# Altium PCB FPGA_Core_FX3.PcbDoc (part 2 of 2)
Units mm, origin at the board's own origin, x right, y up, seen from the top; angles counter-clockwise.
Board outline 27 x 27 mm, 6 copper layers (Signal_T, GND_T, PWR, Signal_INT, GND_B, Signal_B), stack 0.816 mm thick; 82 components, 137 nets, 677 pads, 343 vias.
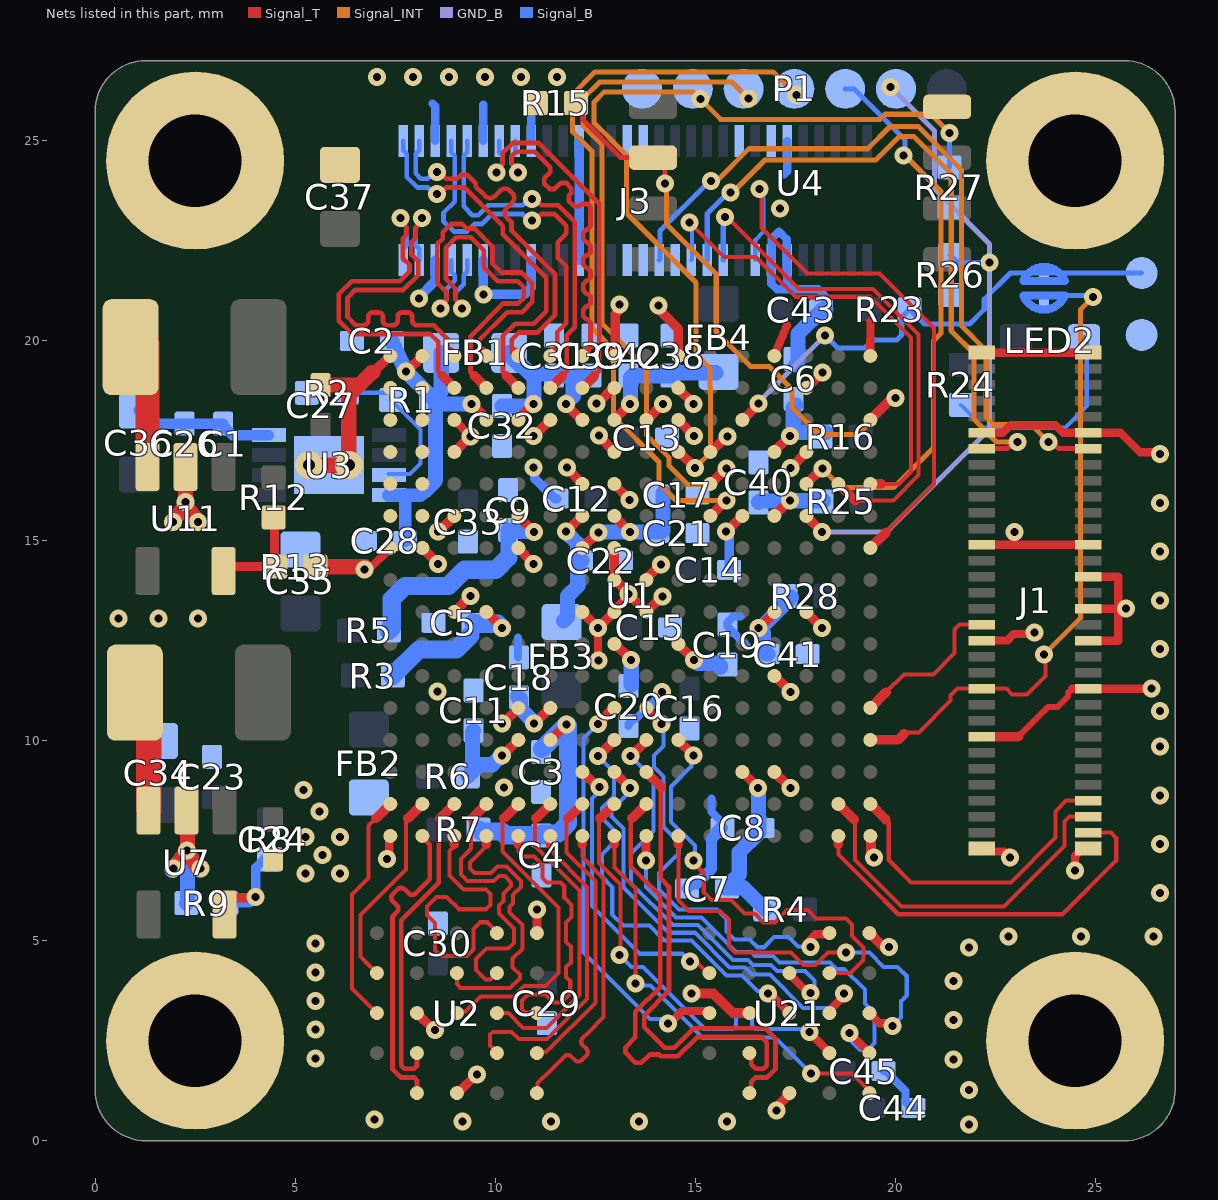
[diagram p6: the nets of this part, all layers, seen from the top]

## Via types
v1: diameter 0.45, hole 0.2, Signal_T to Signal_B, tented both sides, 340 vias
v2: diameter 0.7, hole 0.3, Signal_T to Signal_B, tented both sides, 2 vias
v3: diameter 0.45, hole 0.2, Signal_T to Signal_B, tented top, 1 vias

## Nets (pads, with @x,y where several pads share a name; then routed paths per layer and width w, separated by ;. In a path a pad name is that pad's centre, name@x,y a point inside that pad or via, vN(x,y) a via of type N, cw(c..) or ccw(c..) an arc to the next point about the centre after c; other vN are vias at no path point) (continued)
GND: C1.1 C2.1 C3.1 C4.1 C5.1 C6.1 C7.1 C8.1 C9.1 C11.1 C12.1 C13.1 C14.1 C15.1 C16.1 C17.1 C18.1 C19.1 C20.1 C21.1 C22.1 C23.1 C24.1 C26.1 C27.1 C28.1 C29.1 C30.1 C31.1 C32.1 C33.1 C34.2 C35.2 C36.2 C37.2 C38.1 C39.1 C40.1 C41.1 C42.1 C43.1 C44.1 C45.1 J1.9 J1.10 J1.23 J1.24 J1.27 J1.31 J1.35 J1.36 J1.41 J1.48 J1.S1 J3.11 J3.12 J3.13 J3.14 J3.37 J3.38 J3.43 J3.44 J3.49 J3.50 J3.55 J3.56 L7.1 P1.1 pad.Q5 pad.Q6 pad.Q7 pad.Q8 R2.1 R9.2 R13.1 R15.2 R26.1 R27.1 U1.A1 U1.A8 U1.A10 U1.A13 U1.A16 U1.B8 U1.B10 U1.B14 U1.C3 U1.C6 U1.C9 U1.C10 U1.D3 U1.D8 U1.D14 U1.E7 U1.E8 U1.F3 U1.F12 U1.G1 U1.G2 U1.G5 U1.G8 U1.H8 U1.H9 U1.J3 U1.J7 U1.J8 U1.J9 U1.J14 U1.L13 U1.M5 U1.P13 U1.T1 U1.T16 U2.B3 U2.C1 U2.E5 U3.4 U3.9 U4.4 U7.2 U11.2 U21.B3 U21.C1 U21.E5 | length 93.6
  Signal_T w0.102: v1(7.296,7.04) v1@7.351,7.095 ; U1.T1@7.351,7.592 U1.T1@7.379,7.62
  Signal_T w0.152: 23.089,10.109 23.825,10.846 24.061,10.846 24.324,11.108 24.324,11.201 24.421,11.299
  Signal_T w0.203: v1(6.738,14.285) 6.844,14.285 U1.G1@7.379,14.82 ; v1@7.351,7.095 U1.T1@7.351,7.592 ; U1.C3@8.979,18.02 8.979,18.016 9.374,17.621 v1@9.374,17.607 ; U2.C1@9.045,1.191 U2.C1@9.068,1.191 ; v1@9.527,1.651 v1(9.55,1.651) ; v1@12.575,12.016 v1@12.575,12.807 ; U1.A13@16.979,19.62 17.297,20.396 ; U1.A16@19.379,19.62 19.38,20.498 ; J1.S1@22.17,7.3 22.243,7.227 22.73,7.227 v1(22.872,7.084) ; J1.36@22.17,12.5 22.179,12.509 22.805,12.509 22.959,12.663 23.437,12.663 v1(23.485,12.71) ; J1.24@22.17,14.9 22.962,14.9 ; J1.10@22.17,17.7 22.701,17.7 22.887,17.886 24.009,17.886 24.195,17.7 J1.9@24.83,17.7 25.632,17.7 26.121,17.211 26.572,17.211 v1(26.619,17.164) ; J1.S1@22.17,19.7 J1.S1@24.83,19.7 ; v1(22.987,15.215) 22.962,15.215 22.962,14.9 ; 24.421,11.299 24.829,11.299 J1.41@24.83,11.3 v1(26.413,11.3) ; v1(24.494,6.76) 24.494,7.119 24.675,7.3 J1.S1@24.83,7.3 ; J1.35@24.83,12.5 25.578,12.5 v1@25.578,13.3 ; J1.31@24.83,13.3 v1@25.578,13.3 ; J1.27@24.83,14.1 25.578,14.1 v1@25.578,13.3 ; J1.23@24.83,14.9 22.962,14.9 ; v1(25.775,13.3) v1@25.578,13.3
  Signal_T w0.229: U2.B3@8.045,3.191 v1@8.439,2.797 ; U2.C1@9.068,1.191 v1@9.527,1.651 ; U2.E5@11.045,5.191 v1(11.045,5.782)
  Signal_T w0.24: 6.947,19.202 7.37,19.625 U1.A1@7.391,19.625 ; U1.G2@8.179,14.82 v1@8.574,14.426 ; v1@8.585,15.226 U1.F3@8.979,15.62 ; U1.J3@8.979,13.22 v1@9.374,13.615 ; U1.D3@8.98,17.213 v1@9.374,17.607 ; v1@10.185,10.426 U1.M5@10.579,10.82 ; U1.G5@10.57,14.818 v1@10.964,14.424 ; v1@10.975,17.619 U1.C6@11.369,18.013 ; v1@11.793,16.815 U1.E7@12.187,16.421 ; U1.J7@12.172,13.22 v1@12.566,12.826 ; v1(12.539,18.434) 12.566,18.434 12.96,18.828 U1.B8@12.979,18.828 ; v1@12.575,12.016 v1(12.584,12.007) ; v1@12.575,12.807 v1(12.566,12.816) 12.571,12.816 12.975,13.22 U1.J8@12.979,13.22 12.979,13.25 13.297,13.568 13.297,13.642 13.337,13.683 U1.H8@12.979,14.041 ; v1@12.593,17.615 U1.D8@12.987,17.221 ; U1.E8@12.966,16.424 v1@13.36,16.03 ; U1.H8@12.979,14.02 U1.H8@12.979,14.041 ; U1.G8@12.979,14.82 U1.H8@12.979,14.041 ; U1.A8@12.979,19.62 13,19.641 13,20.659 13.066,20.724 13.066,20.864 v1(13.106,20.904) ; v1(13.337,13.673) 13.337,13.668 13.779,13.226 U1.J9@13.779,13.22 ; U1.H9@13.742,14.013 v1@14.136,14.407 ; U1.J9@13.778,13.214 v1@14.172,13.608 ; U1.C9@13.792,18.018 14.186,18.412 v1(14.201,18.412) ; v1(14.079,20.879) 14.079,20.794 14.58,20.292 U1.A10@14.58,19.652 ; U1.B10@14.563,18.823 v1@14.957,18.429 ; U1.C10@14.581,18.017 14.581,18.012 14.972,17.621 v1(14.972,17.613) ; v1@15.785,15.235 U1.F12@16.179,15.629 ; U1.P13@16.973,9.219 v1@17.368,8.825 ; U1.L13@16.985,11.624 16.987,11.624 17.371,11.24 v1@17.383,11.24 ; v1@17.032,0.841 U21.C1@17.373,1.182 ; v1@17.395,16.822 U1.D14@17.789,17.216 ; U1.J14@17.772,13.223 v1@18.166,12.829 ; U1.B14@17.78,18.813 v1@18.174,19.207 ; U21.E5@19.357,5.191 19.709,4.84 v1(19.847,4.84) ; J1.48@22.17,10.1 23.079,10.1 23.089,10.109
  Signal_T w0.254: v1(14.905,3.682) 15.454,3.682 15.945,3.191 U21.B3@16.357,3.191 ; U1.T16@19.379,7.62 19.398,7.602 19.398,7.209 19.469,7.138 v1(19.469,7.085)
  Signal_T w0.381: v1@1.917,15.447 v1@2.262,15.891 ; v1@1.949,6.788 2.303,7.247 v1@2.307,7.253 ; U11.2@2.261,16.997 U11.2@2.261,16.845 2.261,16.088 2.262,16.086 v1@2.262,15.891 ; 2.262,15.697 v1@2.262,15.891 ; U7.2@2.286,8.255 2.307,8.234 v1@2.307,7.253 ; v1@2.574,6.791 v1@2.307,7.253 ; v1@2.593,15.46 v1@2.262,15.891 ; v2(5.341,16.887) v2(6.341,16.887) 6.341,18.628 6.602,18.89 ; R13.1@5.504,14.351 6.738,14.351 v1(6.738,14.285) ; C27.1@5.639,18.89 6.602,18.89 ; 6.947,19.202 6.915,19.202 6.602,18.89
  Signal_B w0.203: 8.433,25.933 8.503,25.863 J3.55@8.503,24.994 ; J3.49@9.703,24.994 9.703,25.908 ; C18.1@10.568,12.084 10.568,12.574 ; J3.43@10.903,24.994 10.903,25.813 10.922,25.832 ; C20.1@13.334,10.363 13.334,10.413 13.483,10.562 13.533,10.562 13.847,10.876 13.883,10.876 ; 15.405,8.556 15.405,8.225 C8.1@15.604,8.026 ; 16.134,13.103 15.954,13.103 15.805,12.955 C19.1@15.805,12.905 15.805,12.855 16.3,12.36 ; 17.221,24.155 17.303,24.237 J3.11@17.303,24.994 ; 17.297,21.311 17.303,21.316 J3.12@17.303,22.014 17.29,22.028 17.29,22.537 17.094,22.733 16.917,22.555 16.917,22.028 J3.14@16.903,22.014 16.903,21.425 17.043,21.285 18.085,21.285 18.237,21.133 18.237,20.817 C43.1@18.275,20.78 ; C45.1@19.713,1.742 19.763,1.742 20.258,1.247 20.258,0.972 20.407,0.824 C44.1@20.457,0.824
  Signal_B w0.24: v1(8.103,21.057) 8.103,21.093 8.498,21.488 8.498,22.009 J3.56@8.503,22.014 ; J3.50@9.703,22.014 v1(9.703,21.158) 10.737,21.158 10.903,21.324 J3.44@10.903,22.014 ; v1(10.953,16.825) 10.993,16.784 10.993,16.549 11.49,16.053 C12.1@11.54,16.053 ; J3.38@12.103,22.014 J3.37@12.103,24.994 ; v1(15.776,15.235) 15.776,15.178 15.853,15.101 C14.1@15.853,14.324
  Signal_B w0.254: C36.2@1.092,18.25 1.142,18.25 1.468,17.924 C26.1@2.235,17.924 C1.1@3.202,17.924 3.202,17.874 3.439,17.637 U3.4@4.341,17.637 ; 13.883,10.876 14.176,11.169 v1(14.176,11.222)
  Signal_B w0.279: C7.1@14.797,6.304 14.907,6.414 15.033,6.414 15.41,6.792 15.41,7.549 15.52,7.659 15.52,7.713 15.63,7.823 C8.1@15.68,7.823
  Signal_B w0.381: v1@1.931,6.764 1.949,6.788 2.303,7.247 v1@2.307,7.253 ; R9.2@2.281,5.939 2.286,5.939 2.307,5.961 2.307,6.931 ; 2.349,6.931 v1@2.307,7.253 ; v1@2.547,6.821 v1@2.307,7.253 ; C6.1@17.515,19.393 17.575,19.452 17.575,20.174 18.18,20.78 C43.1@18.275,20.78
  other v1: 21.844,0.406 9.188,0.483 11.392,0.483 13.595,0.483 15.799,0.483 6.985,0.533 17.032,0.75 21.844,1.27 21.463,2.032 5.512,2.06 5.512,2.777 8.497,2.768 21.463,3.023 5.512,3.494 21.463,3.988 5.512,4.211 21.844,4.826 5.512,4.928 22.835,5.105 24.65,5.105 26.465,5.105 26.619,6.198 1.956,6.808 2.634,6.808 2.295,7.253 26.619,7.416 26.619,8.635 17.379,8.82 10.218,8.829 26.619,9.853 10.176,10.426 26.619,10.741 8.56,11.233 17.383,11.22 26.619,12.29 18.166,12.82 0.59,13.057 1.58,13.057 2.569,13.057 26.619,13.509 9.383,13.615 14.182,13.608 14.146,14.407 8.574,14.417 10.964,14.415 26.619,14.727 8.576,15.226 1.944,15.471 2.571,15.471 26.619,15.946 2.257,15.967 13.36,16.02 11.793,16.825 17.385,16.822 9.384,17.607 10.965,17.619 12.593,17.625 14.957,18.419 18.184,19.207 17.124,23.307 7.042,26.594 7.943,26.594 8.843,26.594 9.744,26.594 10.645,26.594 11.545,26.594
GPIO21: J1.2@23.722,20.951 J1.42 U1.N16 | length 16.5
  Signal_T w0.102: 20.222,10.172 20.258,10.207 20.592,10.207 21.387,11.002 21.387,11.125 21.562,11.3 J1.42@22.17,11.3 22.787,11.3 22.927,11.16 23.301,11.16 23.564,11.423 23.76,11.619 23.76,12.109 v1(23.718,12.151)
  Signal_T w0.24: U1.N16@19.379,10.02 20.071,10.02 20.222,10.172
  Signal_INT w0.127: v1(23.718,12.151) 24.638,13.071 24.638,20.785 v1(24.946,21.093)
  Signal_B w0.127: 23.724,21.128 24.242,21.128 24.911,21.128 v1(24.946,21.093)
GPIO24: J1.34 U1.M16 | length 4
  Signal_T w0.102: 19.774,11.215 20.218,11.659 20.959,11.659 21.488,12.188 21.488,12.777 21.612,12.9 J1.34@22.17,12.9
  Signal_T w0.24: U1.M16@19.379,10.82 19.774,11.215
INITN: U1.D11 | length 0.6
  Signal_T w0.24: U1.D11@15.367,17.214 15.391,17.214 15.785,17.608 v3(15.803,17.608)
JTAG_EN: P1.2 R27.2 U1.D10 | length 21.5
  Signal_T w0.24: U1.D10@14.597,17.221 v1@14.991,16.827
  Signal_INT w0.127: v1(14.991,16.817) 15.388,17.213 15.388,18.852 15.367,18.872 15.367,19.318 15.02,19.665 15.02,21.457 13.284,23.193 13.284,24.638 12.475,25.447 12.475,25.97 12.718,26.213 14.963,26.213 15.641,25.534 19.616,25.534 19.744,25.662 20.897,25.662 v1(21.361,25.197)
  Signal_B w0.127: R27.2@21.355,24.335 21.361,24.341 v1(21.361,25.197)
  other v1: 15.138,26.037
JTAG_TCK: P1.6 R26.2 U1.F14 | length 16.5
  Signal_T w0.24: U1.F14@17.772,15.62 v1@18.166,15.226
  GND_B w0.127: v1(18.166,15.216) 19.788,15.216 22.361,17.789 v1(22.361,21.96) 22.361,22.419 20.981,23.799 20.981,25.247 v1(19.888,26.34)
  Signal_B w0.127: R26.2@21.375,22.147 21.562,21.96 v1(22.361,21.96)
JTAG_TDI: P1.4 U1.F11 | length 19.1
  Signal_T w0.24: U1.F11@15.38,15.613 v1@15.774,16.007
  Signal_INT w0.127: v1(15.784,16.007) 14.524,16.007 14.097,16.434 14.097,16.967 12.955,18.11 12.955,19.782 12.421,20.316 12.421,24.74 11.938,25.222 11.938,26.162 12.497,26.721 16.946,26.721 v1(17.528,26.139)
JTAG_TDO: P1.5 U1.E14 | length 14.1
  Signal_T w0.24: U1.E14@17.775,16.411 v1@18.169,16.805
  Signal_INT w0.127: v1(18.179,16.805) 18.652,16.332 19.964,16.332 20.963,17.332 20.963,19.998 21.149,20.184 21.149,23.728 20.249,24.629 v1(20.214,24.629)
  Signal_B w0.127: P1.5@18.752,26.295 18.977,26.295 20.249,25.023 v1@20.249,24.643
JTAG_TMS: P1.3 U1.E11 | length 16.9
  Signal_T w0.24: U1.E11@15.38,16.413 v1@15.774,16.807
  Signal_INT w0.127: v1(15.784,16.807) 15.378,16.401 14.819,16.401 14.351,16.87 14.351,17.072 13.786,17.638 13.786,19.311 12.675,20.422 12.675,24.888 12.192,25.371 12.192,26.046 12.613,26.467 15.922,26.467 v1(16.337,26.052)
LDO_1V0: C2.2 C28.2 FB1.2 R1.2 U1.A2 U1.C4 U3.8 | length 10.1
  Signal_T w0.24: v1@7.785,19.226 U1.A2@8.179,19.62 ; v1@9.424,18.417 U1.C4@9.818,18.023
  Signal_B w0.305: U3.8@7.341,16.137 7.75,16.137 C28.2@7.75,14.999
  Signal_B w0.33: U3.8@7.341,16.137 8.137,16.138 8.23,16.231
  Signal_B w0.381: C2.2@7.416,19.993 v1(7.776,19.226) 8.509,18.493 8.509,18.423 8.61,18.524 8.61,18.706 8.652,18.748 FB1.2@8.652,19.698 ; 8.23,16.231 8.509,16.51 8.509,18.419 9.408,18.419 v1(9.412,18.423)
MCLK: R15.1 U1.C16 U4.6 | length 14.7
  Signal_T w0.127: R15.1@12.019,25.94 12.189,25.77 12.189,25.53 13.143,24.576 U4.6@13.948,24.576 14.009,24.576 14.246,24.339 v1(14.246,23.927)
  Signal_T w0.24: U1.C16@19.38,18.023 19.38,18.025 19.919,18.564 v1(20.014,18.564)
  Signal_INT w0.127: v1(14.246,23.927) 14.289,23.884 14.289,22.907 15.528,21.668 15.528,20.216 16.387,19.356 16.855,19.356 17.424,18.786 17.424,18.339 18.11,17.653 19.075,17.653 19.987,18.564 v1(20.014,18.564)
MIPI0_CLK_N: U1.D2
MIPI0_CLK_P: U1.D1
MIPI0_D0_N: U1.E2
MIPI0_D0_P: U1.E1
MIPI0_D1_N: U1.C2
MIPI0_D1_P: U1.C1
MIPI0_D2_N: U1.F2
MIPI0_D2_P: U1.F1
MIPI0_D3_N: U1.B2
MIPI0_D3_P: U1.B1
MIPI1_CLK_N: J3.59 U1.B5 | length 9.8
  Signal_T w0.117: v1(8.546,23.67) 8.62,23.67 8.781,23.832 9.23,23.832 10.191,22.871 10.191,22.663 11.279,21.575 11.279,20.737 10.964,20.422 10.499,20.422 10.197,20.119 10.197,19.203 U1.B5@10.579,18.82
  Signal_T w0.24: 10.279,19.123 U1.B5@10.579,18.82
  Signal_B w0.117: J3.59@7.703,24.994 7.703,24.76 7.794,24.67 7.794,24.092 8.054,23.832 8.311,23.832 8.472,23.67 v1(8.546,23.67)
MIPI1_CLK_P: J3.57 U1.A5 | length 9.5
  Signal_T w0.117: v1(8.546,24.212) 8.62,24.212 8.781,24.051 9.051,24.051 9.149,24.148 9.306,24.148 9.518,23.936 9.518,23.854 9.714,23.658 9.755,23.617 ccw(c9.875,23.736) 9.994,23.617 10.129,23.752 cw(c10.248,23.632) 10.368,23.752 10.427,23.692 cw(c10.308,23.573) 10.427,23.453 10.293,23.318 ccw(c10.412,23.199) 10.293,23.08 10.41,22.962 10.41,22.754 11.498,21.666 11.498,20.646 11.055,20.203 10.59,20.203 10.415,20.029 10.415,19.805 10.579,19.642 U1.A5@10.579,19.62
  Signal_T w0.24: U1.A5@10.478,19.722 U1.A5@10.579,19.62
  Signal_B w0.117: J3.57@8.103,24.994 8.103,24.76 8.013,24.67 8.013,24.183 8.145,24.051 8.311,24.051 8.472,24.212 v1(8.546,24.212)
MIPI1_D0_N: J3.52 U1.B4 | length 9.8
  Signal_T w0.117: v1(9.171,20.803) 9.171,20.876 9.009,21.038 9.009,21.298 8.774,21.534 8.774,22.33 9.032,22.588 9.39,22.588 9.715,22.264 9.715,21.838 10.065,21.488 10.566,21.488 10.712,21.343 10.712,21.063 10.582,20.932 10.208,20.932 9.385,20.108 9.385,19.715 9.385,19.215 U1.B4@9.779,18.82
  Signal_T w0.24: 9.479,19.123 U1.B4@9.779,18.82
  Signal_B w0.117: v1(9.171,20.803) 9.171,20.876 9.009,21.038 9.009,21.204 9.213,21.407 9.213,21.639 9.303,21.729 J3.52@9.303,22.014
MIPI1_D0_P: J3.54 U1.A4 | length 9.5
  Signal_T w0.117: v1(8.629,20.803) 8.629,20.876 8.79,21.038 8.79,21.207 8.555,21.443 8.555,22.42 8.687,22.553 8.687,22.71 8.893,22.916 9.175,22.916 9.284,22.807 9.481,22.807 9.934,22.354 9.934,21.929 10.155,21.707 10.657,21.707 10.931,21.433 10.931,20.972 10.672,20.713 10.299,20.713 9.604,20.018 9.604,19.805 9.779,19.63 U1.A4@9.779,19.62
  Signal_T w0.24: U1.A4@9.678,19.731 U1.A4@9.779,19.63
  Signal_B w0.117: v1(8.629,20.803) 8.629,20.876 8.71,20.957 8.722,20.957 8.79,21.026 8.79,21.294 8.994,21.498 8.994,21.639 8.903,21.729 J3.54@8.903,22.014
MIPI1_D1_N: J3.51 U1.B6 | length 9.8
  Signal_T w0.117: v1(10.922,23.546) 10.996,23.546 11.157,23.385 11.578,23.385 11.993,22.969 11.993,20.335 11.794,20.135 11.794,19.235 U1.B6@11.379,18.82
  Signal_T w0.24: U1.B6@11.379,18.82 11.682,19.12
  Signal_B w0.117: J3.51@9.303,24.994 9.303,24.709 9.213,24.619 9.213,23.358 9.433,23.138 9.576,23.138 9.823,23.385 10.687,23.385 10.848,23.546 v1(10.922,23.546)
MIPI1_D1_P: J3.53 U1.A6 | length 9.5
  Signal_T w0.117: v1(10.922,23.004) 10.996,23.004 11.157,23.166 11.487,23.166 11.774,22.878 11.774,22.671 11.568,22.465 11.568,22.068 11.774,21.862 11.774,20.437 11.555,20.217 11.555,19.805 11.379,19.63 U1.A6@11.379,19.62
  Signal_T w0.24: U1.A6@11.379,19.63 U1.A6@11.481,19.732
  Signal_B w0.117: J3.53@8.903,24.994 8.903,24.709 8.994,24.619 8.994,23.478 8.708,23.192 8.708,22.989 8.965,22.732 9.295,22.732 9.48,22.917 9.665,22.917 9.913,23.166 10.687,23.166 10.848,23.004 v1(10.922,23.004)
MIPI1_D2_N: J3.60 U1.B3 | length 9.8
  Signal_T w0.117: v1(7.632,23.063) 7.632,22.989 7.794,22.828 7.794,22.661 7.687,22.555 7.687,22.066 7.86,21.894 7.86,21.733 7.616,21.489 6.413,21.489 6.091,21.167 6.091,20.502 6.425,20.168 8.38,20.168 8.579,19.968 8.579,19.22 U1.B3@8.979,18.82
  Signal_T w0.24: 8.679,19.123 U1.B3@8.979,18.82
  Signal_B w0.117: v1(7.632,23.063) 7.632,22.989 7.794,22.828 7.794,22.39 7.703,22.299 J3.60@7.703,22.014
MIPI1_D2_P: J3.58 U1.A3 | length 9.5
  Signal_T w0.117: v1(8.174,23.063) 8.174,22.989 8.013,22.828 8.013,22.57 7.906,22.464 7.906,22.157 8.079,21.984 8.079,21.642 7.707,21.27 6.503,21.27 6.311,21.077 6.311,20.592 6.516,20.387 6.712,20.387 ccw(c6.712,20.504) 6.829,20.504 6.829,20.597 cw(c6.939,20.597) 6.939,20.707 7.086,20.707 cw(c7.086,20.597) 7.195,20.597 7.195,20.497 ccw(c7.305,20.497) 7.305,20.387 7.452,20.387 ccw(c7.452,20.497) 7.562,20.497 7.562,20.597 cw(c7.672,20.597) 7.672,20.707 7.818,20.707 cw(c7.818,20.597) 7.928,20.597 7.928,20.504 ccw(c8.045,20.504) 8.045,20.387 8.47,20.387 8.817,20.04 8.817,19.805 8.979,19.643 U1.A3@8.979,19.62
  Signal_T w0.24: U1.A3@8.878,19.722 U1.A3@8.979,19.62
  Signal_B w0.117: J3.58@8.103,22.014 8.103,22.299 8.013,22.39 8.013,22.828 8.174,22.989 v1(8.174,23.063)
MIPI1_D3_N: J3.47 U1.B7 | length 9.8
  Signal_T w0.117: v1(10.032,24.206) 10.032,24.28 10.194,24.441 10.194,24.698 10.437,24.941 11.086,24.941 12.604,23.423 12.604,19.245 U1.B7@12.179,18.82
  Signal_T w0.24: U1.B7@12.179,18.82 12.482,19.12
  Signal_B w0.117: v1(10.032,24.206) 10.032,24.257 10.194,24.418 10.194,24.619 10.103,24.709 J3.47@10.103,24.994
MIPI1_D3_P: J3.45 U1.A7 | length 9.5
  Signal_T w0.117: v1(10.574,24.206) 10.574,24.28 10.413,24.441 10.413,24.607 10.528,24.722 10.996,24.722 11.076,24.642 11.38,24.338 11.38,24.207 11.229,24.056 11.229,23.925 11.36,23.794 11.492,23.794 11.642,23.944 11.774,23.944 11.905,23.813 11.905,23.682 11.845,23.622 11.845,23.49 11.976,23.359 12.108,23.359 12.168,23.419 12.299,23.419 12.385,23.332 12.385,23.238 12.385,22.859 12.305,22.779 12.282,22.779 12.202,22.699 12.202,22.539 12.282,22.458 12.305,22.458 12.385,22.378 12.385,22.218 12.305,22.138 12.282,22.138 12.202,22.058 12.202,21.897 12.282,21.817 12.305,21.817 12.385,21.737 12.385,21.577 12.305,21.497 12.282,21.497 12.202,21.417 12.202,21.256 12.282,21.176 12.305,21.176 12.385,21.096 12.385,20.936 12.305,20.856 12.282,20.856 12.202,20.776 12.202,20.615 12.282,20.535 12.305,20.535 12.385,20.455 12.385,19.826 U1.A7@12.179,19.62
  Signal_T w0.24: U1.A7@12.179,19.62 U1.A7@12.281,19.722
  Signal_B w0.117: J3.45@10.503,24.994 10.503,24.709 10.413,24.619 10.413,24.418 10.574,24.257 v1(10.574,24.206)
NetC3_2: C3.2 C4.2 R7.1 U1.N6 | length 6.3
  Signal_T w0.24: U1.N6@11.38,10.013 v1@11.774,10.407
  Signal_B w0.457: R7.1@9.59,7.776 9.635,7.73 10.165,7.73 10.262,7.633 C4.2@11.158,7.633 11.158,7.649 11.18,7.671 11.557,7.671 11.82,7.934 11.82,10.37 v1(11.784,10.407) C3.2@11.17,9.793
NetC5_2: C5.2 R3.2 U1.J4 | length 3.7
  Signal_T w0.24: U1.J4@9.779,13.22 v1@10.173,12.828
  Signal_B w0.457: R3.2@7.441,11.626 8.095,12.28 9.03,12.28 9.386,12.635 ; C5.2@9.457,12.949 9.478,12.927 10.064,12.927 v1(10.173,12.818)
NetC6_2: C6.2 R16.2 U1.D13 | length 2.3
  Signal_T w0.24: U1.D13@16.97,17.229 v1@17.365,17.623
  Signal_B w0.381: C6.2@17.515,18.393 17.456,18.333 17.456,17.723 17.374,17.641 v1(17.374,17.623) 17.393,17.623 17.474,17.704 R16.2@18.263,17.704
NetC7_2: C7.2 C8.2 R4.2 U1.P12 | length 4.7
  Signal_T w0.24: U1.P12@16.179,9.223 v1@16.573,8.829
  Signal_B w0.381: v1@16.573,8.82 16.573,8.801 16.586,8.788 16.586,8.106 16.595,8.097 C8.2@16.595,7.705 ; C8.2@16.595,7.764 16.57,7.764 16.57,7.68 16.102,7.212 16.102,6.661 15.906,6.465 15.906,6.363 15.87,6.327 15.774,6.327 16.203,6.327 R4.2@16.753,5.777
  other v1: 16.573,8.82
NetC9_2: C9.2 R5.2 U1.F5 | length 6
  Signal_T w0.24: U1.F5@10.572,15.62 v1@10.966,15.225
  Signal_B w0.381: 10.326,14.58 C9.2@10.326,15.264 ; C9.2@10.37,15.229 10.953,15.229 v1(10.966,15.216)
  Signal_B w0.457: R5.2@7.341,12.75 7.412,12.821 7.412,13.533 7.747,13.868 8.827,13.868 9.234,14.275 10.022,14.275 10.326,14.58
NetC11_2: C11.2 R6.2 U1.N5 | length 2.7
  Signal_T w0.24: v1@10.183,9.626 U1.N5@10.577,10.021
  Signal_B w0.381: R6.2@9.319,9.111 9.606,9.398 9.926,9.398 10.154,9.626 v1(10.173,9.626) ; R6.2@9.428,9.22 9.428,9.436 9.436,9.443 9.436,10.233 C11.2@9.461,10.258
NetC17_2: C17.2 C18.2 C19.2 C20.2 C21.2 FB2.1 U1.F8 U1.G7 U1.K8 U1.K10 U1.M6 | length 7.6
  Signal_T w0.24: v1@10.985,10.434 U1.M6@11.379,10.828 ; U1.G7@12.176,14.812 v1@12.57,15.207 ; U1.F8@12.972,15.621 v1@13.366,15.226 ; U1.K8@12.997,12.42 v1@13.391,12.026 ; U1.K10@14.572,12.42 v1@14.966,12.026
  Signal_B w0.381: C18.2@10.568,11.109 10.627,11.05 10.627,10.801 10.962,10.466 v1@10.962,10.447 ; v1(12.579,15.207) 12.593,15.22 14.161,15.22 14.194,15.253 14.194,16.192 C17.2@14.207,16.205 ; v1(13.391,12.016) 13.391,11.998 13.404,11.985 C20.2@13.404,11.395 ; v1(14.966,12.016) 14.985,12.016 15.063,11.938 15.568,11.938 15.628,11.879 C19.2@15.628,11.829
  other v1: 5.258,6.68 6.121,6.68 5.69,7.137 5.258,7.595 6.121,7.595 5.613,8.23 5.207,8.763 10.975,10.434 13.366,15.217
NetC22_2: C22.2 FB3.1 U1.F7 | length 3.2
  Signal_T w0.24: v1@11.784,15.232 U1.F7@12.179,15.627
  Signal_B w0.381: FB3.1@11.709,12.991 11.811,13.093 11.811,13.614 12.065,13.869 12.065,14.444 C22.2@12.125,14.503 ; v1(11.775,15.232) 11.775,15.214 12.065,14.923 12.065,14.563 C22.2@12.125,14.503 ; C22.2@12.175,14.503 C22.2@12.125,14.503
NetC31_2: C31.2 C32.2 C39.2 FB1.1 U1.C5 U1.C7 | length 5.6
  Signal_T w0.24: U1.C5@10.556,18.024 v1@10.95,18.418 ; v1@11.801,18.379 U1.C7@12.195,17.985
  Signal_B w0.381: C32.2@10.176,18.371 10.893,18.371 10.941,18.418 v1(10.959,18.418) 10.973,18.432 10.973,19.031 ; FB1.1@10.352,19.698 10.352,19.648 10.612,19.388 10.662,19.388 10.879,19.171 11.424,19.171 C31.2@11.47,19.125 11.954,19.125 ; v1(11.77,18.414) 11.77,18.432 11.95,18.612 11.95,19.056 11.954,19.06 11.954,19.125 ; C39.2@12.407,19.125 11.954,19.125
NetC38_2: C38.2 C42.2 FB4.1 U1.C8 | length 3.4
  Signal_T w0.24: U1.C8@12.981,18.026 13.37,18.416 v1(13.37,18.42)
  Signal_B w0.381: v1(13.37,18.42) 13.383,18.434 13.383,19.081 13.427,19.125 C38.2@14.388,19.125 14.388,19.14 14.448,19.2 FB4.1@15.519,19.2
NetC40_2: C40.2 R25.2 U1.F13 | length 2.2
  Signal_T w0.24: U1.F13@16.968,15.613 v1@17.362,16.007
  Signal_B w0.381: C40.2@16.586,15.959 16.621,15.994 17.358,15.994 17.36,15.996 v1@17.371,15.996 ; v1@17.371,15.989 v1@17.371,15.996 ; R25.2@18.2,15.996 v1@17.371,15.996
  other v1: 17.371,16.007
NetC41_2: C41.2 R28.2 U1.J13 | length 2.5
  Signal_T w0.24: v1@16.598,12.822 U1.J13@16.992,13.216
  Signal_B w0.381: C41.2@16.815,12.167 16.765,12.167 16.705,12.226 16.705,12.686 16.588,12.803 v1(16.588,12.822) 16.602,12.835 16.653,12.835 R28.2@17.407,13.589
NetL2_1: L2.1 U7.3 | length 3
  Signal_T w0.635: L2.1@0.991,11.201 L2.1@1.336,10.856 ; U7.3@1.336,8.28 L2.1@1.336,10.831
NetL3_1: L3.1 U11.3 | length 3.7
  Signal_T w0.6: L3.1@0.889,19.914 1.311,19.914 U11.3@1.311,16.616
NetLED2_A: LED2.A R24.2 | length 5.4
  Signal_B w0.102: R24.2@21.641,18.398 22.203,17.836 24.262,17.836 24.79,18.364 24.79,20.019 LED2.A@24.721,20.088
NetR1_1: R1.1 R2.2 U3.7 | length 4.1
  Signal_B w0.102: R2.2@6.291,18.698 7.399,18.698 R1.1@7.399,18.517 8.138,17.778 8.138,16.926 7.874,16.662 U3.7@7.341,16.662
NetR8_1: R8.1 R9.1 U7.5 | length 3.1
  Signal_T w0.229: U7.5@3.236,5.655 3.236,5.887 3.422,6.072 4,6.072 v1(4.015,6.087)
  Signal_B w0.229: R9.1@3.281,5.939 3.867,5.939 v1(4.015,6.087) 4.015,6.827 R8.1@4.347,7.16
NetR12_1: R12.1 R13.2 U11.5 | length 2.7
  Signal_T w0.229: U11.5@3.211,14.397 3.211,14.445 U11.5@3.396,14.63 ; U11.5@3.396,14.351 R13.2@4.504,14.351 4.484,14.371 4.484,15.563 R12.1@4.464,15.583
PROGRAMN: J1.1@23.722,21.663 L4.1 R23.1 U1.C12 | length 12.5
  Signal_T w0.24: U1.C12@16.184,18.012 v1@16.578,18.406
  GND_B w0.127: v1(16.588,18.429) 16.588,18.47 v1(18.252,20.135)
  Signal_B w0.127: v1(18.252,20.135) 18.574,19.814 19.23,19.814 19.431,20.015 20.041,20.015 20.166,20.141 20.166,20.595 R23.1@20.361,20.789 20.732,20.419 21.863,20.419 22.228,20.784 22.228,21.038 22.882,21.692 23.34,21.692 23.722,21.692 24.107,21.692 L4.1@26.162,21.692
PS0_CK_N: U1.T2 U2.B1 | length 7.9
  Signal_T w0.117: U2.B1@8.045,1.191 8.045,1.513 7.976,1.582 7.64,1.582 7.435,1.788 7.435,5.606 7.498,5.669 7.54,5.711 ccw(c7.451,5.8) 7.54,5.889 7.441,5.988 cw(c7.53,6.077) 7.441,6.166 7.559,6.284 cw(c7.648,6.195) 7.737,6.284 7.836,6.185 ccw(c7.925,6.274) 8.014,6.185 8.243,6.414 8.367,6.538 8.367,7.401 8.281,7.487 8.179,7.589 U1.T2@8.179,7.62
PS0_CK_P: U1.R3 U2.B2 | length 8.9
  Signal_T w0.117: U2.B2@8.045,2.191 8.045,1.87 7.976,1.801 7.731,1.801 7.654,1.878 7.654,5.515 8.588,6.45 8.588,8.029 U1.R3@8.979,8.42 8.624,8.065
  Signal_T w0.24: 8.618,8.059 U1.R3@8.979,8.42
PS0_CS: U1.R1 U2.A3 | length 6.7
  Signal_T w0.102: 7.018,8.059 6.835,7.876 6.835,6.57 6.426,6.161 6.426,3.81 6.74,3.496 ; 7.024,8.065 7.249,8.29 ; U1.R1@7.316,8.42 U1.R1@7.379,8.42 ; 6.74,3.496 U2.A3@7.045,3.191 6.74,3.496
  Signal_T w0.24: 7.018,8.059 U1.R1@7.379,8.42
PS0_DQ0: U1.R6 U2.D3 | length 8.5
  Signal_T w0.102: U2.D3@10.045,3.191 10.33,3.191 10.702,2.819 11.284,2.819 12.106,3.641 12.106,6.257 10.998,7.364 10.998,8.039 U1.R6@11.379,8.42
  Signal_T w0.24: 11.018,8.059 U1.R6@11.379,8.42
PS0_DQ1: U1.T6 U2.D2 | length 7.9
  Signal_T w0.102: U2.D2@10.045,2.191 10.045,2.205 9.873,2.376 9.873,2.653 9.942,2.722 10.412,2.722 10.594,2.54 11.3,2.54 12.299,3.539 12.299,6.345 11.379,7.264 11.379,7.417
  Signal_T w0.24: 11.379,7.417 U1.T6@11.379,7.62
PS0_DQ2: U1.T4 U2.C4 | length 7.6
  Signal_T w0.102: U2.C4@9.045,4.191 9.045,3.912 9.139,3.817 10.373,3.817 10.616,4.061 10.616,4.158 10.439,4.335 10.439,4.557 10.68,4.798 10.68,5.388 10.358,5.71 10.358,5.847 10.448,5.937 10.448,6.15 10.644,6.345 10.644,6.498 10.348,6.793 10.283,6.858 10.058,6.858 9.897,6.697 9.483,6.697 9.373,6.807 9.373,6.96 9.735,7.322 9.735,7.576 U1.T4@9.779,7.62
  Signal_T w0.24: 9.779,7.417 U1.T4@9.779,7.62
PS0_DQ3: U1.R4 U2.D4 | length 8.7
  Signal_T w0.102: 9.424,8.065 U1.R4@9.779,8.42 ; 9.538,8.179 U1.R4@9.779,8.42 ; U2.D4@10.045,4.191 9.881,4.028 9.765,4.028 9.525,4.267 9.525,4.547 9.779,4.801 10.324,4.801 10.472,4.948 10.472,5.302 10.095,5.679 10.095,5.878 10.211,5.994 10.211,6.185 10.398,6.372 10.398,6.456 10.242,6.613 10.096,6.613 9.971,6.488 9.311,6.488 9.144,6.655 9.144,7.043 9.4,7.299 9.4,8.041 U1.R4@9.779,8.42
  Signal_T w0.24: 9.418,8.059 U1.R4@9.779,8.42
PS0_DQ4: U1.T3 U2.D5 | length 8.3
  Signal_T w0.102: 8.979,7.417 U1.T3@8.979,7.62 8.979,7.358 8.863,7.242 8.863,6.631 9.215,6.279 9.773,6.279 9.881,6.172 9.881,5.897 9.77,5.787 9.097,5.787 8.788,6.096 8.534,6.096 8.298,5.859 8.298,5.647 8.497,5.447 8.497,4.771 8.656,4.612 9.295,4.612 9.463,4.78 9.463,5.297 9.627,5.461 9.804,5.461 10.045,5.221 U2.D5@10.045,5.191
  Signal_T w0.24: 8.979,7.417 U1.T3@8.979,7.62
PS0_DQ5: U1.T5 U2.E3 | length 7.1
  Signal_T w0.102: 10.579,7.417 10.579,7.224 10.698,7.105 10.97,7.105 11.186,6.889 11.186,6.566 11.293,6.46 11.63,6.46 11.728,6.361 11.728,6.075 11.913,5.89 11.913,5.593 11.777,5.456 11.777,4.97 11.893,4.854 11.893,4.445 ; U2.E3@11.037,3.199 10.746,3.199 10.668,3.277 10.668,3.505 10.818,3.655 11.255,3.655 11.455,3.454 11.646,3.454 11.878,3.686 11.878,3.988 11.775,4.09 11.775,4.342 11.878,4.445
  Signal_T w0.24: 10.579,7.417 U1.T5@10.579,7.62
PS0_DQ6: U1.R7 U2.E2 | length 7.9
  Signal_T w0.102: U2.E2@11.045,2.191 11.074,2.221 11.277,2.221 12.504,3.449 12.504,6.489 11.786,7.207 11.786,8.027 U1.R7@12.179,8.42
  Signal_T w0.24: 11.818,8.059 U1.R7@12.179,8.42
PS0_DQ7: U1.T7 U2.E1 | length 7.9
  Signal_T w0.102: U2.E1@11.045,1.191 11.061,1.208 11.061,1.437 11.409,1.785 11.73,2.106 cw(c11.816,2.021) 11.902,2.106 11.994,2.014 ccw(c12.08,2.1) 12.165,2.014 12.28,2.128 ccw(c12.194,2.214) 12.28,2.3 12.187,2.392 cw(c12.273,2.478) 12.187,2.563 12.33,2.706 12.713,3.089 12.713,6.553 12.179,7.087 12.179,7.417
  Signal_T w0.24: 12.179,7.417 U1.T7@12.179,7.62
PS0_RST: U1.R2 U2.A4 | length 6.3
  Signal_T w0.102: 6.74,4.496 U2.A4@7.045,4.191 6.635,4.601 6.635,5.644 7.772,6.782 7.772,8.013 ; 7.824,8.065 7.938,8.179 ; 7.938,8.179 U1.R2@8.179,8.42 7.938,8.179
  Signal_T w0.24: 7.818,8.059 U1.R2@8.179,8.42
PS0_RW: U1.R5 U2.C3 | length 8.4
  Signal_T w0.102: U2.C3@9.045,3.191 9.088,3.235 9.263,3.235 9.637,3.609 10.472,3.609 10.727,3.864 11.257,3.864 11.582,4.189 11.582,5.832 10.185,7.229 10.185,8.026 U1.R5@10.579,8.42
  Signal_T w0.24: 10.218,8.059 U1.R5@10.579,8.42
PS1_CK_N: U1.P9 U21.B1 | length 13
  Signal_T w0.117: U1.P9@13.779,9.22 14.142,8.858 14.142,6.556 14.346,6.352 14.346,3.749 13.724,3.127 13.724,2.839 14.236,2.327 14.477,2.327 14.961,2.811 16.752,2.811 16.944,2.619 17.008,2.554 17.008,1.786 16.804,1.582 16.51,1.582 16.402,1.473 16.402,1.236 U21.B1@16.357,1.191
  Signal_T w0.24: U1.P9@13.759,9.233 14.153,8.838
PS1_CK_P: U1.R9 U21.B2 | length 12.9
  Signal_T w0.117: U1.R9@13.779,8.42 13.392,8.033 13.392,6.855 14.127,6.12 14.127,3.84 13.505,3.218 13.505,2.583 13.26,2.338 13.26,2.197 13.508,1.949 13.658,1.949 13.862,2.153 14.1,2.153 14.145,2.108 14.567,2.108 15.051,2.592 16.662,2.592 16.789,2.464 16.789,1.877 16.713,1.801 16.51,1.801 16.402,1.909 16.402,2.147 U21.B2@16.357,2.191
  Signal_T w0.24: 13.418,8.059 U1.R9@13.779,8.42
PS1_CS: U1.M8 U21.A3 | length 10.5
  Signal_T w0.203: v1(14.317,2.927) 14.335,2.945 14.377,2.945 14.671,3.239 15.31,3.239 U21.A3@15.357,3.191
  Signal_T w0.24: v1@12.58,10.434 U1.M8@12.974,10.829
  Signal_B w0.102: v1(12.57,10.415) 12.208,10.053 12.208,4.71 13.874,3.044 14.236,3.044 14.236,3.008 v1(14.317,2.927)
PS1_DQ0: U1.P8 U21.D3 | length 10.9
  Signal_T w0.203: U21.D3@18.357,3.191 18.357,3.253 18.724,3.62 v1(18.724,3.682)
  Signal_T w0.24: U1.P8@12.972,9.22 v1@13.366,8.826
  Signal_B w0.102: v1(13.366,8.82) 13.366,8.732 12.907,8.272 12.907,8.106 13.207,7.806 13.207,6.327 14.334,5.199 14.994,5.199 15.864,4.329 16.243,4.329 16.42,4.152 16.868,4.152 17.698,3.322 18.364,3.322 v1(18.724,3.682)
PS1_DQ1: U1.R8 U21.D2 | length 11.5
  Signal_T w0.102: U1.R8@12.979,8.42 12.598,8.039 12.598,6.941 13.132,6.407 13.132,4.674 v1(13.106,4.648)
  Signal_T w0.203: v1(17.856,2.718) 17.856,2.705 18.344,2.217 18.344,2.191 U21.D2@18.357,2.191
  Signal_T w0.24: 12.618,8.059 U1.R8@12.979,8.42
  Signal_B w0.102: v1(13.106,4.648) 13.411,4.343 13.693,4.343 15.241,2.795 15.85,2.795 15.9,2.795 ccw(c15.9,2.916) 16.022,2.916 16.022,3.021 cw(c16.143,3.021) 16.143,3.143 16.304,3.143 cw(c16.304,3.021) 16.425,3.021 16.425,2.916 ccw(c16.547,2.916) 16.547,2.795 17.259,2.795 17.622,2.795 17.633,2.784 17.79,2.784 v1(17.856,2.718)
PS1_DQ2: U1.N9 U21.C4 | length 10.8
  Signal_T w0.203: U21.C4@17.357,4.191 17.357,4.161 17.828,3.689 v1(17.881,3.689)
  Signal_T w0.24: v1@13.396,9.614 U1.N9@13.79,10.009
  Signal_B w0.102: v1(13.386,9.614) 13.96,9.04 13.96,7.737 13.4,7.177 13.4,6.433 14.441,5.392 15.074,5.392 15.944,4.522 16.323,4.522 16.451,4.394 16.899,4.394 17.048,4.245 17.743,4.245 17.981,4.007 17.981,3.884 17.924,3.827 v1@17.924,3.737
PS1_DQ3: U1.N10 U21.D4 | length 10.9
  Signal_T w0.102: v1(14.954,7.002) 14.995,6.961 14.995,6.918 15.215,6.699 15.215,6.213 15.408,6.02 15.9,6.02 16.236,5.684 16.49,5.684 16.713,5.461 16.993,5.461 17.295,5.764 17.815,5.764 18.02,5.559 18.774,5.559 18.923,5.41 18.923,5.117 19.214,4.826 19.214,4.521 18.884,4.191 U21.D4@18.357,4.191
  Signal_T w0.24: U1.N10@14.559,10.033 v1@14.953,9.638
  Signal_B w0.102: v1(14.953,9.629) 14.902,9.578 14.902,9.349 14.402,8.849 14.402,7.97 14.995,7.376 14.995,7.093 14.954,7.052 v1(14.954,7.002)
PS1_DQ4: U1.M9 U21.D5 | length 10.8
  Signal_T w0.203: v1(17.879,4.837) 17.879,5.032 18.009,5.162 18.328,5.162 U21.D5@18.357,5.191 U21.D5@18.378,5.191
  Signal_T w0.24: U1.M9@13.759,10.82 v1@14.153,10.426
  Signal_B w0.102: v1(14.153,10.416) 14.209,10.361 14.209,9.865 13.97,9.627 13.97,9.338 14.209,9.1 14.209,7.838 14.58,7.468 14.58,7.18 14.096,6.697 14.096,6.283 14.601,5.778 15.546,5.778 15.787,5.538 15.787,5.225 15.985,5.027 16.364,5.027 16.555,4.837 16.724,4.837 16.976,5.089 17.339,5.089 17.57,4.858 17.857,4.858 v1(17.879,4.837)
PS1_DQ5: U1.T10 U21.E3 | length 10.9
  Signal_T w0.102: 14.579,7.417 14.579,6.01 14.841,5.748 15.627,5.748 15.85,5.526 15.85,4.853 16.001,4.701 17.398,4.701 17.709,4.39 18.004,4.39 18.316,4.701 v1(18.774,4.701)
  Signal_T w0.203: U21.E3@19.322,3.191 U21.E3@19.357,3.191 19.612,2.937 19.872,2.937 v1(19.939,2.87)
  Signal_T w0.24: 14.579,7.417 U1.T10@14.579,7.62
  Signal_B w0.102: v1(18.774,4.701) 19.359,4.701 19.714,4.347 20.056,4.347 20.29,4.112 20.29,3.628 20.158,3.496 20.15,3.496 20.15,3.082 v1(19.939,2.87)
PS1_DQ6: U1.T9 U21.E2 | length 10.9
  Signal_T w0.117: v1(13.767,7.01) v1@13.773,7.017 ; U1.T9@13.773,7.614 U1.T9@13.779,7.62
  Signal_T w0.203: v1(18.858,2.692) U21.E2@19.357,2.191
  Signal_T w0.229: v1@13.773,7.017 U1.T9@13.773,7.614
  Signal_B w0.102: v1(13.767,7.01) 13.767,6.339 14.521,5.585 15.154,5.585 16.024,4.715 16.403,4.715 16.498,4.62 16.948,4.62 17.11,4.458 18.37,4.458 18.532,4.296 18.724,4.296 19.241,3.779 19.241,3.433 19.482,3.192 19.482,2.44 19.307,2.265 19.126,2.265 18.925,2.466 18.925,2.626 v1(18.858,2.692)
PS1_DQ7: U1.T8 U21.E1 | length 11.1
  Signal_T w0.102: U1.T8@12.979,7.62 12.979,6.833 13.504,6.308 v1(13.504,3.934) ; v1(17.891,1.676) 18.924,1.676 19.357,1.242 U21.E1@19.357,1.191
  Signal_T w0.24: 12.979,7.417 U1.T8@12.979,7.62
  Signal_B w0.102: v1(13.504,3.934) 13.556,3.882 13.881,3.882 15.188,2.575 16.992,2.575 v1(17.891,1.676)
PS1_RST: U1.P7 U21.A4 | length 7.2
  Signal_T w0.102: v1(14.875,4.486) 15.016,4.486 15.311,4.191 U21.A4@15.357,4.191
  Signal_T w0.24: U1.P7@12.184,9.22 v1@12.578,8.826
  Signal_B w0.102: v1(12.608,8.839) 12.608,8.745 12.421,8.557 12.421,5.871 13.618,4.674 14.687,4.674 v1(14.875,4.486)
PS1_RW: U1.N8 U21.C3 | length 10.7
  Signal_T w0.203: v1(16.822,3.678) 16.87,3.678 U21.C3@17.357,3.191
  Signal_T w0.24: v1@12.585,9.621 U1.N8@12.979,10.015
  Signal_B w0.102: v1(12.575,9.621) 12.976,9.22 12.976,8.615 12.675,8.313 12.675,8.065 13.011,7.728 13.011,7.501 12.668,7.158 12.668,6.599 12.927,6.34 12.927,5.657 13.206,5.378 13.856,5.378 14.228,5.006 14.907,5.006 15.784,4.13 16.169,4.13 16.556,3.743 16.758,3.743 v1(16.822,3.678)
SCL_1V8: J1.12 J3.22 | length 17.1
  Signal_T w0.127: J1.12@22.17,17.3 22.805,17.3 22.973,17.468 v1(23.061,17.468)
  Signal_INT w0.127: v1(15.88,23.706) 15.933,23.706 16.746,24.52 19.516,24.52 20.097,25.1 20.474,25.1 21.403,24.171 21.403,20.244 21.97,19.677 21.97,18.035 22.537,17.468 v1(23.061,17.468)
  Signal_B w0.127: J3.22@15.303,22.014 15.303,23.181 15.828,23.706 v1(15.88,23.706)
SDA_1V8: J1.11 J3.28 | length 19.1
  Signal_T w0.127: v1(23.839,17.464) 23.927,17.464 24.091,17.3 J1.11@24.83,17.3
  Signal_INT w0.127: v1(15.397,23.99) 15.534,23.99 16.342,24.798 19.315,24.798 19.871,25.354 20.58,25.354 21.657,24.277 21.657,20.371 22.278,19.751 22.278,18.087 22.465,17.899 23.404,17.899 v1(23.839,17.464)
  Signal_B w0.127: J3.28@14.103,22.014 14.117,22.029 14.117,22.746 15.361,23.99 v1(15.397,23.99)
SDO: J3.17
TENABLE: J3.29
TOUT: J3.31
UART_CTS: J1.57 U1.R15 | length 9.7
  Signal_T w0.102: U1.R15@18.579,8.42 18.992,8.008 18.992,7.02 20.158,5.854 22.72,5.854 24.232,7.366 24.232,7.976 24.356,8.1 J1.57@24.83,8.1
  Signal_T w0.24: U1.R15@18.579,8.42 18.974,8.026
UART_RX: J1.59 U1.T15 | length 9.9
  Signal_T w0.102: 18.579,7.417 18.579,7.16 18.748,6.991 18.748,6.989 19.267,6.47 19.269,6.47 19.329,6.411 20.078,5.661 24.189,5.661 25.527,7 25.527,7.569 25.396,7.7 J1.59@24.83,7.7
  Signal_T w0.24: 18.579,7.417 U1.T15@18.579,7.62
UART_TX: J1.55 U1.R16 | length 8.6
  Signal_T w0.102: U1.R16@19.379,8.42 19.84,7.959 19.84,7.016 20.398,6.458 22.892,6.458 24.011,7.577 24.011,8.235 24.276,8.5 J1.55@24.83,8.5
  Signal_T w0.24: U1.R16@19.371,8.425 19.765,8.031
XCE: J3.24 U1.E16 | length 12.5
  Signal_T w0.102: v1(14.865,22.956) 15.723,22.098 16.515,22.098 17.514,21.099 19.372,21.099 20.396,20.075 20.396,16.718 20.099,16.42 U1.E16@19.379,16.42
  Signal_T w0.24: U1.E16@19.323,16.423 19.653,16.423
  Signal_B w0.102: v1(14.865,22.956) 14.865,22.93 14.919,22.876 14.919,22.03 J3.24@14.903,22.014
XCLR: J3.16 U1.G16 | length 15
  Signal_T w0.102: v1(16.607,23.793) 16.665,23.735 16.665,22.822 17.808,21.679 19.612,21.679 20.975,20.315 20.975,16.416 19.77,15.211 U1.G16@19.379,14.82
  Signal_T w0.24: U1.G16@19.375,14.812 19.772,15.209
  Signal_B w0.102: J3.16@16.503,22.014 16.503,22.519 16.71,22.726 16.71,23.575 16.674,23.611 16.674,23.726 v1(16.607,23.793)
XHS: J3.30
XMASTER: J3.20 U1.E15 | length 13.7
  Signal_T w0.102: v1(15.748,23.089) 15.798,23.089 17.594,21.293 19.452,21.293 20.589,20.155 20.589,16.638 19.954,16.003 18.997,16.003 U1.E15@18.579,16.42
  Signal_T w0.24: U1.E15@18.608,16.395 19.005,15.998
  Signal_B w0.127: J3.20@15.703,22.014 15.703,23.044 v1(15.748,23.089)
XTRIG: J3.32
XVS: J3.26
pads on no net: C1.0 C2.0 C3.0 C4.0 C5.0 C6.0 C7.0 C8.0 C9.0 C11.0 C12.0 C13.0 C14.0 C15.0 C16.0 C17.0 C18.0 C19.0 C20.0 C21.0 C22.0 C23.0 C24.0 C26.0 C27.0 C28.0 C29.0 C30.0 C31.0 C32.0 C33.0 C34.0 C35.0 C36.0 C37.0 C38.0 C39.0 C40.0 C41.0 C42.0 C43.0 C44.0 C45.0 FB1.0 FB2.0 FB3.0 FB4.0 J3.15 J3.19 J3.21 J3.23 J3.25 J3.27 J3.33 J3.34 J3.35 J3.36 J3.39 J3.41 J3.42 J3.46 J3.48 LED2.0 R1.0 R2.0 R3.0 R4.0 R5.0 R6.0 R7.0 R8.0 R9.0 R12.0 R13.0 R15.0 R16.0 R23.0 R24.0 R25.0 R26.0 R27.0 R28.0 U1.A9 U1.A11 U1.A12 U1.A14 U1.A15 U1.B9 U1.B12 U1.C11 U1.C13 U1.D4 U1.D5 U1.D6 U1.E4 U1.E5 U1.E6 U1.E9 U1.E10 U1.E12 U1.E13 U1.F4 U1.F6 U1.F9 U1.F10 U1.F15 U1.G3 U1.G4 U1.G6 U1.G9 U1.G10 U1.G11 U1.G12 U1.G13 U1.G14 U1.G15 U1.H1 U1.H2 U1.H3 U1.H4 U1.H5 U1.H6 U1.H10 U1.H11 U1.J1 U1.J2 U1.J5 U1.J6 U1.K1 U1.K2 U1.K3 U1.K4 U1.K5 U1.K6 U1.K7 U1.K11 U1.K12 U1.K13 U1.K14 U1.K15 U1.K16 U1.L1 U1.L2 U1.L3 U1.L4 U1.L5 U1.L6 U1.L7 U1.L8 U1.L10 U1.L15 U1.L16 U1.M1 U1.M2 U1.M3 U1.M4 U1.M7 U1.M10 U1.N1 U1.N2 U1.N3 U1.N4 U1.N7 U1.P1 U1.P2 U1.P3 U1.P4 U1.P5 U1.P6 U2.A2 U2.A5 U2.B5 U2.C2 U2.C5 U3.5 U3.6 U7.0 U11.0 U21.A2 U21.A5 U21.B5 U21.C2 U21.C5

## Polygon pours and split planes (outlines as drawn)
FPGA_1V8 on PWR "FPGA_1V8_L03_P151" (solid, pour order 151): 4.011,5.537 4.011,13.483 4.775,13.483 4.775,17.45 10.135,17.45 10.135,11.405 15.342,11.405 15.342,15.164 18.756,15.164 18.756,15.748 18.756,18.124 19.627,18.124 19.627,19.837 17.653,19.837 17.653,18.343 16.423,16.916 14.122,16.916 14.122,20.269 12.37,20.269 12.37,23.866 21.361,23.866 21.387,18.491 22.348,17.885 26.035,17.856 26.035,5.537
+5V on PWR "+5V_L03_P135" (solid, pour order 135): 21.387,18.491 21.996,17.882 27,17.882 27,25.73 ccw(c25.73,25.73) 25.73,27 1.27,27 ccw(c1.27,25.73) 0,25.73 0,1.27 ccw(c1.27,1.27) 1.27,0 3.912,0 3.912,13.483 4.775,13.483 4.775,21.438 5.249,21.938 12.37,21.976 12.37,23.825 17.272,23.825 17.272,22.649 19.929,22.649 21.387,21.191
FPGA_1V8 on PWR "FPGA_1V8_L03_P137" (solid, pour order 137): 1.27,0 cw(c1.27,1.27) 0,1.27 0,5.69 27,5.69 27,1.27 cw(c25.73,1.27) 25.73,0
GND on PWR "GND_L03_P152" (solid, pour order 152): 26.035,17.783 26.035,5.69 27,5.69 27,17.783
FPGA_1V0 on PWR "FPGA_1V0_L03_P138" (solid, pour order 138): 4.445,21.92 12.344,21.92 12.344,20.269 14.122,20.269 14.122,16.916 16.528,17.017 17.699,18.265 17.653,19.837 19.583,19.837 19.559,17.931 18.621,17.932 18.665,15.164 18.517,15.164 15.342,15.164 15.342,11.405 10.135,11.405 10.135,17.45 4.445,17.45
GND on PWR "GND_L03_P011" (solid, pour order 11): 6.655,26.899 6.655,26.314 12.878,26.314 12.878,26.899
no net on PWR "NONET_L03_P136" (solid, pour order 136): 1.194,0
+5V on PWR "+5V_L03_P131" (solid, pour order 131): 0,13.03 2.981,13.03 2.981,14.697 3.912,14.697 3.912,17.501 2.743,17.501 2.743,17.247 0,17.247
+5V on PWR "+5V_L03_P123" (solid, pour order 123): 0,4.623 2.981,4.623 2.981,6.289 3.912,6.289 3.912,9.093 2.743,9.093 2.743,8.839 0,8.839
no net on PWR "NONET_L03_P121" (solid, pour order 121): 14.68,27.002
no net on PWR "NONET_L03_P115" (solid, pour order 115): 23.444,4.562
no net on PWR "NONET_L03_P114" (solid, pour order 114): 19.888,6.35
no net on PWR "NONET_L03_P083" (solid, pour order 83): 9.042,36.601
no net on PWR "NONET_L03_P079" (solid, pour order 79): 2.819,6.248
no net on PWR "NONET_L03_P020" (solid, pour order 20): 6.864,12.237
no net on PWR "NONET_L03_P017" (solid, pour order 17): 6.864,12.237
no net on PWR "NONET_L03_P012" (solid, pour order 12): 19.279,10.871
GND on Signal_T "GND_L01_P143" (solid, pour order 143): 27,5.385 27,25.73 ccw(c25.73,25.73) 25.73,27 19.964,27 19.964,19.778 22.633,19.797 22.62,17.57 19.964,17.573 19.964,5.385
GND on Signal_T "GND_L01_P144" (solid, pour order 144): 19.964,27 1.27,27 ccw(c1.27,25.73) 0,25.73 0,17.636 ccw(c0.11,17.636) 0.11,17.526 6.375,17.526 cw(c6.375,17.475) 6.426,17.475 6.426,23.089 8.611,25.273 11.378,25.273 12.99,23.661 12.99,20.193 19.964,20.193
GND on Signal_T "GND_L01_P141" (solid, pour order 141): 1.27,0 cw(c1.27,1.27) 0,1.27 0,6.998 27,6.998 27,1.27 cw(c25.73,1.27) 25.73,0
FPGA_1V0 on Signal_T "FPGA_1V0_L01_P140" (solid, pour order 140): 2.794,23.774 6.706,23.774 7.061,23.419 7.061,22.174 6.782,21.895 6.071,21.895 5.715,21.539 5.715,20.193 6.426,19.482 6.426,17.475 2.794,17.475 2.794,22.327
+5V on Signal_T "+5V_L01_P122" (solid, pour order 122): 0,4.623 2.981,4.623 2.981,6.289 3.912,6.289 3.912,9.093 2.743,9.093 2.743,8.839 0,8.839
+5V on Signal_T "+5V_L01_P042" (solid, pour order 42): 20.879,19.541 26.868,19.541 26.868,17.848 20.879,17.848
no net on Signal_T "NONET_L01_P142" (solid, pour order 142): 27,6.998
+5V on Signal_T "+5V_L01_P124" (solid, pour order 124): 0,13.31 2.981,13.31 2.981,14.976 3.912,14.976 3.912,17.78 2.743,17.78 2.743,17.526 0,17.526
NetC17_2 on Signal_T "NETC17_2_L01_P132" (solid, pour order 132): 4.928,9.068 6.401,9.068 6.401,6.426 4.928,6.426
FPGA_1V8 on Signal_T "FPGA_1V8_L01_P128" (solid, pour order 128): 3.2,13.665 6.731,13.665 6.731,9.169 4.089,9.169 4.089,9.452 3.2,9.452
no net on Signal_T "NONET_L01_P125" (solid, pour order 125): 2.981,13.424
no net on Signal_T "NONET_L01_P119" (solid, pour order 119): 6.579,17.628
no net on Signal_T "NONET_L01_P109" (solid, pour order 109): 8.585,-0.508
no net on Signal_T "NONET_L01_P100" (solid, pour order 100): 56.142,26.162
+5V on Signal_T "+5V_L01_P080" (solid, pour order 80): -3.002,1.473
no net on Signal_T "NONET_L01_P077" (solid, pour order 77): 23.317,7.442
GND on Signal_INT "GND_L04_P154" (solid, pour order 154): 1.27,0 cw(c1.27,1.27) 0,1.27 0,25.73 cw(c1.27,25.73) 1.27,27 25.73,27 cw(c25.73,25.73) 27,25.73 27,1.27 cw(c25.73,1.27) 25.73,0
no net on Signal_INT "NONET_L04_P049" (solid, pour order 49): 46.584,28.702
+5V on Signal_INT "+5V_L04_P045" (solid, pour order 45): 28.854,26.492
GND on Signal_B "GND_L06_P150" (solid, pour order 150): 1.27,0 cw(c1.27,1.27) 0,1.27 0,23.876 27,23.876 27,1.27 cw(c25.73,1.27) 25.73,0
GND on Signal_B "GND_L06_P153" (solid, pour order 153): 0,22.098 0,25.73 cw(c1.27,25.73) 1.27,27 25.73,27 cw(c25.73,25.73) 27,25.73 27,22.098
+5V on Signal_B "+5V_L06_P133" (solid, pour order 133): 0,13.386 1.67,13.386 2.981,14.697 3.912,14.697 3.912,17.501 2.743,17.501 2.743,17.247 0,17.247
+5V on Signal_B "+5V_L06_P126" (solid, pour order 126): 0,4.623 2.981,4.623 2.981,6.289 3.912,6.289 3.912,9.093 2.743,9.093 2.743,8.839 0,8.839
+5V on Signal_B "+5V_L06_P108" (solid, pour order 108): 17.514,25.564 20.269,25.564 20.269,21.324 17.51,21.324
NetC17_2 on Signal_B "NETC17_2_L06_P129" (solid, pour order 129): 4.928,9.169 7.722,9.169 7.722,6.401 4.928,6.401
no net on Signal_B "NONET_L06_P134" (solid, pour order 134): 1.143,0
FPGA_1V8 on Signal_B "FPGA_1V8_L06_P127" (solid, pour order 127): 3.81,13.665 6.731,13.665 6.731,9.169 4.089,9.169 4.089,9.452 3.81,9.452
no net on Signal_B "NONET_L06_P118" (solid, pour order 118): 6.756,6.096
GND on GND_T "GND_L02_P139" (solid, pour order 139): 1.27,0 cw(c1.27,1.27) 0,1.27 0,25.73 cw(c1.27,25.73) 1.27,27 25.73,27 cw(c25.73,25.73) 27,25.73 27,1.27 cw(c25.73,1.27) 25.73,0
no net on GND_T "NONET_L02_P117" (solid, pour order 117): 1.27,27
GND on GND_B "GND_L05_P149" (solid, pour order 149): 1.27,0 25.73,0 ccw(c25.73,1.27) 27,1.27 27,25.73 ccw(c25.73,25.73) 25.73,27 1.27,27 ccw(c1.27,25.73) 0,25.73 0,1.27 ccw(c1.27,1.27)
FPGA_1V8 on GND_B "FPGA_1V8_L05_P148" (solid, pour order 148): 2.87,9.174 2.87,20.701 17.704,20.701 17.704,17.323 17.079,17.323 6.579,17.323 6.579,9.174
NetC17_2 on GND_B "NETC17_2_L05_P146" (solid, pour order 146): 4.928,9.068 6.706,9.068 6.706,17.323 17.12,17.323 17.12,10.998 11.608,10.998 11.608,6.426 4.928,6.426
FPGA_1V8 on GND_B "FPGA_1V8_L05_P147" (solid, pour order 147): 6.732,9.174 4.877,9.174 4.877,13.65 6.739,13.65

## Keep-outs
Keep-Out Layer:
  lines w0.02: 0,1.27 ccw(c1.27,1.27) 1.27,0 3.937,0 21.082,0 25.73,0 ccw(c25.73,1.27) 27,1.27 27,5.918 27,23.038 27,25.73 ccw(c25.73,25.73) 25.73,27 23.038,27 1.854,27 1.27,27 ccw(c1.27,25.73) 0,25.73 0,25.146 0,3.937 0,1.27

## Other copper
Signal_T:
  pour cut-out: 7.061,22.174 7.061,23.724 8.611,25.273 11.608,25.273 13.03,23.851 13,23.821 13,20.15 7.094,20.15 6.426,19.482 5.715,20.193 5.715,21.539 6.075,21.899 7.071,21.899
  pour cut-out: 7.336,0.914 19.807,0.914 19.807,6.401 6.121,6.401 6.121,2.432
  pour cut-out: 19.964,20.193 19.964,6.999 6.883,6.999 6.883,20.193
Signal_B:
  pour cut-out: 12.243,6.528 12.243,5.001 15.085,2.159 17.58,2.159 18.28,1.459 19.874,1.459 20.739,2.324 20.739,5.042 20.422,5.359 16.441,5.359 15.222,6.579 14.63,6.579
  pour cut-out: 7.442,21.59 7.442,25.502 11.379,25.502 11.379,21.539

## Silkscreen, mask and mechanical layers (free items; w line width, h text height)
Top Overlay:
  text "1V0" at 6.065,15.119 h0.76 r90
  text "1V8" at 6.065,11.359 h0.76 r90
  text "www.CircuitValley.com" at 26.628,4.623 h0.89 r90
Bottom Overlay:
  text "EN" at 7.469,26.691 h0.51 r90
  text "MS" at 8.307,26.691 h0.51 r90
  text "DI" at 9.063,26.691 h0.51 r90
  text "DO" at 9.855,26.691 h0.51 r90
  text "CK" at 10.628,26.691 h0.51 r90
  text "GND" at 5.306,26.461 h0.51 r180
  text "1V8" at 10.871,26.468 h0.51 r180
  text "CircuitValley.com" at 5.082,2.232 h0.81 r180
  text "MFrame 1V0 2201" at 5.139,1.098 h0.81 r180
Mechanical 15:
  the board outline again, w0.025